# EAGLE board TinyTinyGame (EAGLE 6.5.0)
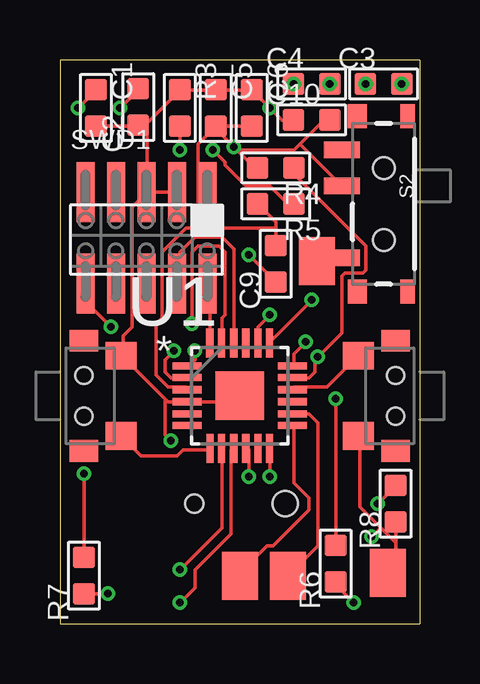
[diagram p0: board, top side]
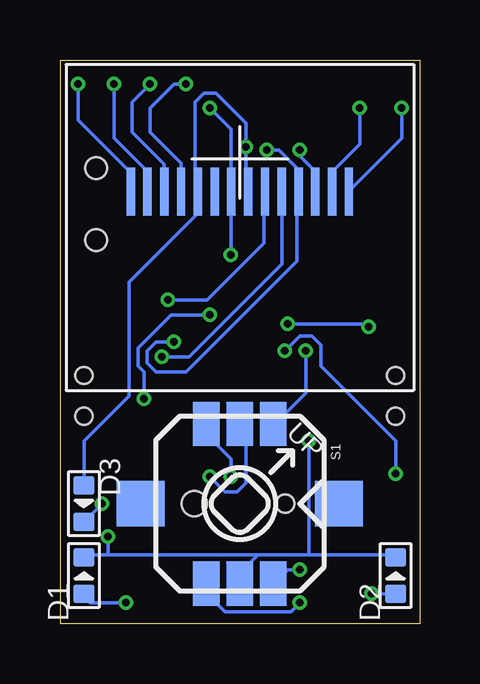
[diagram p1: board, bottom side, seen from below]

Size 15 x 23.5 mm. Coordinates in mm from the lower left corner, seen from the top.
Outline: 0,0 15,0 15,23.5 0,23.5 0,0
Copper layers (1*16): Top 0.035mm / dielectric 1.5mm / Bottom 0.035mm
Design rules "ITEADstudio_DRC": minimum track width 6mil, minimum drill 12mil, track to track 6mil, track to pad 6mil, pad to pad 6mil, via to via 6mil, smd to smd 0mil, copper to edge 10mil, drill to drill 10mil, minimum pad ring 10mil, minimum via ring 6mil, stop-mask expansion 2mil, vias tented up to drill 100mil, thermal gap 10mil

## Footprints (pad centres in the part's own frame; a part is rotated, then mirrored left to right if it is on the bottom)
C0603 = smd 0.889 x 0.889: 1 -0.762,0; 2 0.762,0
LED0603 = smd 0.762 x 0.889: + -0.762,0; - 0.762,0
PAD-1.5X4.5 = smd 1.5 x 2: P$1 0,0
R0603 = smd 0.889 x 0.889: 1 -0.762,0; 2 0.762,0
JOYSTICK_MINI = smd 1.85 x 1.1: A -3.325,1.4; B 3.325,1.4; C -3.325,-1.4; CTR -3.325,0; D 3.325,-1.4; GND 3.325,0 | smd 1.9 x 2: NC 0,4.13; NC@0 0,-4.13 | hole 0.75: 0,1.9 | hole 1.05: 0,-1.9
SWITCH-SPST-SMD-A = smd 0.7 x 1.5: 1 -2.25,-1.75; 2 -0.75,-1.75; 3 2.25,-1.75 | smd 1 x 0.6: GND1 -3.65,1; GND3 3.65,1 | smd 1 x 0.8: GND2 -3.65,-1.1; GND4 3.65,-1.1 | hole 0.9: -1.5,0; 1.5,0
M50-3600542 = smd 0.75 x 2.5: 1 -2.54,-1.81; 2 -2.54,2; 3 -1.27,-1.81; 4 -1.27,2; 5 0,-1.81; 6 0,2; 7 1.27,-1.81; 8 1.27,2; 9 2.54,-1.81; 10 2.54,2
QFN50P400X400X100-25N = smd 1.2 x 0.3: 1 -2.2,1.245; 2 -2.2,0.762; 3 -2.2,0.254; 4 -2.2,-0.254; 5 -2.2,-0.762; 6 -2.2,-1.245; 13 2.2,-1.245; 14 2.2,-0.762; 15 2.2,-0.254; 16 2.2,0.254; 17 2.2,0.762; 18 2.2,1.245 | smd 0.3 x 1.2: 7 -1.245,-2.2; 8 -0.762,-2.2; 9 -0.254,-2.2; 10 0.254,-2.2; 11 0.762,-2.2; 12 1.245,-2.2; 19 1.245,2.2; 20 0.762,2.2; 21 0.254,2.2; 22 -0.254,2.2 | smd 0.305 x 1.2: 23 -0.762,2.2; 24 -1.245,2.2 | smd 2.032 x 2.032: 25 0,0
0.49"-FPC-0.7-14-FOLDED = smd 0.35 x 2: P$1 -4.55,-1.49; P$2 -3.85,-1.49; P$3 -3.15,-1.49; P$4 -2.45,-1.49; P$5 -1.75,-1.49; P$6 -1.05,-1.49; P$7 -0.35,-1.49; P$8 0.35,-1.49; P$9 1.05,-1.49; P$10 1.75,-1.49; P$11 2.45,-1.49; P$12 3.15,-1.49; P$13 3.85,-1.49; P$14 4.55,-1.49
2X4TACT = smd 1.15 x 1.3: A -1.675,-1.55; B 1.675,-1.55 | smd 0.9 x 1.2: G1 -2.3,0; G2 2.3,0 | hole 0.7: -0.85,0; 0.85,0

## Placement (x,y rotation side)
C1  2.2uF  [C0603]  1.5,21.5 270 top
C2  4.7uF  [C0603]  3.27,21.54 90 top
C3  1uF  [C0603]  13.5,22.5 0 top
C4  1uF  [C0603]  10.5,22.5 0 top
C5  1uF  [C0603]  6.5,21.5 270 top
C6  1uF  [C0603]  8,21.5 270 top
C9  1uF  [C0603]  9,15 90 top
C10  100nF  [C0603]  10.5,21 0 top
D1  RED  [LED0603]  14,2 90 bottom
D2  GREEN  [LED0603]  1,2 90 bottom
D3  PWR  [LED0603]  14,5 270 bottom
PTB2_TXRX1  M01SMD-4.5X1.5  [PAD-1.5X4.5]  10.71,15.12 180 top
PTB2_TXRX2  M01SMD-4.5X1.5  [PAD-1.5X4.5]  13.67,2.12 180 top
PTB2_TXRX3  M01SMD-4.5X1.5  [PAD-1.5X4.5]  7.5,2 0 top
PTB2_TXRX4  M01SMD-4.5X1.5  [PAD-1.5X4.5]  9.5,2 0 top
R3  390K  [R0603]  5,21.5 270 top
R4  2k DNP  [R0603]  9,19 180 top
R5  2k DNP  [R0603]  9,17.5 180 top
R6  50  [R0603]  11.5,2.5 90 top
R7  50  [R0603]  1,2 90 top
R8  50  [R0603]  14,5 90 top
S1  [JOYSTICK_MINI]  7.5,5 270 bottom
S2  [SWITCH-SPST-SMD-A]  13.5,17.5 270 top
SWD1  CORTEX_SWD  [M50-3600542]  3.61,16.17 180 top
U1  MKL02Z32VFK4  [QFN50P400X400X100-25N]  7.5,9.5 0 top
U$1  0.49"OLEDFOLDED  [0.49"-FPC-0.7-14-FOLDED]  7.5,19.5 0 bottom
U$2  2PSWITCH_SMT_SIDEMOUNT  [2X4TACT]  1,9.5 90 top
U$3  2PSWITCH_SMT_SIDEMOUNT  [2X4TACT]  14,9.5 270 top

## Library data of the parts
C1-C6 C9 C10 D1-D3 R3-R8 = OPL
PTB2_TXRX1-PTB2_TXRX4 = SparkFun-Connectors
S1 S2 = SparkFun-Electromechanical
SWD1 = carrilib with jtags
U1 = FarnellThings; MPN: MKL02Z32VFK4; OC_FARNELL: 2321481; OC_NEWARK: 61W9887; PACKAGE: QFN-24; SUPPLIER: FREESCALE SEMICONDUCTOR
U$1 = zephod-tft
U$2 U$3 = zephod-components

## Nets
3.3V: C5.2 C6.2 C9.2 C10.2 D3.+ R4.2 R5.2 S2.2 SWD1.1 U1.3 U$1.P$5 U$1.P$8
BUTTON1: S1.A U1.2
BUTTON2: S1.D U1.9
BUTTON3: S1.C U1.10
BUTTON4: S1.B U1.8
BUTTON5: S1.CTR U1.12
C1N: C4.1 U$1.P$4
C1P: C4.2 U$1.P$3
C2N: C3.1 U$1.P$2
C2P: C3.2 U$1.P$1
GND: C1.2 C2.1 C5.1 C6.1 C9.1 C10.1 D1.- D2.- PTB2_TXRX2.P$1 R3.1 R8.1 S1.GND SWD1.3 SWD1.5 U1.4 U1.25 U$1.P$7 U$2.B U$3.B
IREF: R3.2 U$1.P$12
N$1: U1.5
N$2: U1.6
N$5: SWD1.4 U1.22
N$6: D1.+ R6.1
N$7: SWD1.2 U1.24
N$8: U$1.P$6
N$14: D2.+ R7.1
N$19: D3.- R8.2
N$20: PTB2_TXRX1.P$1 S2.3
OLED_RESET: U1.19 U$1.P$9
OLED_SCL: R4.1 U1.17 U$1.P$10
OLED_SDA: R5.1 U1.18 U$1.P$11
PTA1: SWD1.10 U1.23
PTA5: U1.7 U$2.A
PTA7: U1.11
PTA8: U1.15
PTA9: U1.16 U$3.A
PTA12: R6.2 U1.20
PTB1: PTB2_TXRX3.P$1 U1.13
PTB2: PTB2_TXRX4.P$1 U1.14
PTB6: R7.2 U1.1
PTB13: U1.21
VCCPANEL: C1.1 U$1.P$14
VCOMH: C2.2 U$1.P$13

## Tracks (layer width: path | path; a pad name or v marks a point on that pad's centre or on a via)
3.3V  (via drill 0.3)
  Top 0.152: C6.2 C5.2 6.5,20.62 | 6.5,20.62 v7.25,19.88 7.38,19.75 | 7.38,19.75 8.12,19 R4.2 | C10.2 11,21 10,20 | 10,20 9.75,19.75 7.38,19.75 | 10,20 S2.2 | 9,16.5 9,16.75 R5.2 | 9,16.5 C9.2 | 9,16.5 6.25,16.5 | 6.25,16.5 5.75,16.5 | 5.75,16.5 5.25,16.5 4.25,15.5 4.25,12.75 4,12.5 4,10.38 4.5,9.88 5.25,9.88 U1.3 | 6.25,16.5 6.25,17.88 SWD1.1 | 6.5,20.62 6.25,20.38 6.12,20.38 5.75,20 5.75,16.5
  Bottom 0.152: D3.+ 14,7.62 12.12,9.5 12.12,14.25 9.38,17 | 9.38,17 9.25,17.12 U$1.P$5 | 9.38,17 9.38,21.75 9,22.12 8.5,22.12 7.25,20.88 v7.25,19.88 7.25,18.12 U$1.P$8
BUTTON1  (via drill 0.3)
  Top 0.152: v4.75,11.38 4.38,11 4.38,10.5 4.62,10.25 5.25,10.25 U1.2
  Bottom 0.152: v4.75,11.38 4.75,9.62 6,8.38 S1.A
BUTTON2  (via drill 0.3)
  Top 0.152: v5,0.88 5.62,1.5 5.62,2.25 7.12,3.75 7.12,7.25 U1.9
  Bottom 0.152: v5,0.88 5.38,0.5 8.12,0.5 8.88,1.25 8.88,1.62 S1.D
BUTTON3  (via drill 0.3)
  Top 0.152: v7.88,6.12 7.88,7.25 U1.10
  Bottom 0.152: v7.88,6.12 7.88,6.88 8.88,7.88 8.88,8.25 S1.C
BUTTON4  (via drill 0.3)
  Top 0.152: v5,2.25 6.75,4 6.75,7.25 U1.8
  Bottom 0.152: v5,2.25 5.5,2.25 6,1.75 S1.B
BUTTON5  (via drill 0.3)
  Top 0.152: v8.75,6.12 8.75,7.25 U1.12
  Bottom 0.152: v8.75,6.12 8.12,5.5 7.62,5.5 7.25,5.88 7.25,8 7.5,8.25 S1.CTR
C1N  (via drill 0.3)
  Top 0.152: v9.75,22.5 C4.1
  Bottom 0.152: U$1.P$4 9.95,19.2 11.25,20.5 11.25,21.5 10.25,22.5 v9.75,22.5
C1P  (via drill 0.3)
  Top 0.152: v11.25,22.5 C4.2
  Bottom 0.152: U$1.P$3 10.65,19.15 12,20.5 12,21.75 v11.25,22.5
C2N  (via drill 0.3)
  Top 0.152: v12.75,22.5 C3.1
  Bottom 0.152: U$1.P$2 11.35,18.85 12.75,20.25 v12.75,22.5
C2P  (via drill 0.3)
  Top 0.152: v14.25,22.5 C3.2
  Bottom 0.152: U$1.P$1 12.05,18.8 14.25,21 14.25,22.49 | 14.25,22.49 C3.2 | v14.25,22.5 14.25,22.49
GND  (via drill 0.3)
  Top 0.152: 14,3.38 14,2.38 13.75,2.12 PTB2_TXRX2.P$1 | 14,3.38 R8.1 | 14,3.38 13.38,4 | 13.38,4 12.5,4.88 12.5,7.75 U$3.B | v13,3.62 13.38,4 | U1.25 7.25,9.25 5.38,9.25 U1.4 5.25,9.25 4.5,9.25 4.38,9.38 | 4.38,9.38 2.62,11.12 U$2.B 2.62,11.25 2.62,12 3,12.38 3,17.38 3.5,17.88 SWD1.5 3.62,18 | v7.88,15.38 C9.1 | 3.62,18 4.88,18 SWD1.3 | C1.2 3.25,20.75 C2.1 | C5.1 R3.1 | C5.1 C6.1 | C5.1 | C10.1 9.25,21 v8.75,21.5 C6.1 | C6.1 | 3.62,20.88 3.38,20.88 C2.1 | R3.1 3.62,20.88 | R3.1 | 3.62,20.88 3.62,18 | 3.62,20.88 C2.1 | v4.62,7.62 4.38,7.88 4.38,9.38
  Bottom 0.152: 6.75,2.88 4.62,2.88 | 4.62,2.88 1,2.88 D2.- | 6.75,2.88 7.5,2.12 S1.GND | 6.75,2.88 13,2.88 | 13,2.88 14,2.88 D1.- | 13,2.88 v13,3.62 | v7.88,15.38 7.88,18 U$1.P$7 7.88,18.12 7.88,20.62 v8.75,21.5 | v4.62,7.62 4.62,2.88
IREF  (via drill 0.3)
  Top 0.152: v5,19.75 R3.2
  Bottom 0.152: v5,19.75 5,19.5 4.38,18.88 4.38,18.12 U$1.P$12
N$5
  Top 0.152: U1.22 7.25,11.75 7.25,15.62 6.75,16.12 5.62,16.12 5,15.5 5,14.25 SWD1.4
N$6  (via drill 0.3)
  Top 0.152: v12.25,0.88 11.5,1.62 R6.1
  Bottom 0.152: v12.25,0.88 13.75,0.88 14,1.12 D1.+
N$7
  Top 0.152: U1.24 6.25,11.75 6.25,14.12 SWD1.2
N$14  (via drill 0.3)
  Top 0.152: v2,1.25 R7.1
  Bottom 0.152: v2,1.25 R7.1
N$19  (via drill 0.3)
  Top 0.152: v13.25,5 R8.2
  Bottom 0.152: v13.25,5 D3.-
N$20
  Top 0.152: S2.3 10.88,15.25 10.75,15.12 PTB2_TXRX1.P$1
OLED_RESET  (via drill 0.3)
  Top 0.152: v10.5,13.5 8.75,11.75 U1.19
  Bottom 0.152: v10.5,13.5 8.88,13.5 6.5,15.88 6.5,18 U$1.P$9
OLED_SCL  (via drill 0.3)
  Top 0.152: R4.1 9.88,19 9.88,18.62 12.75,15.75 12.75,14.75 12.62,14.62 11.88,14.62 11.75,14.5 11.75,12.12 v10.75,11.12 10.62,11 10.62,10.5 10.38,10.25 9.75,10.25 U1.17
  Bottom 0.152: U$1.P$10 5.75,15 9.62,11.12 v10.75,11.12
OLED_SDA  (via drill 0.3)
  Top 0.152: R5.1 9.5,17.5 8.75,18.25 7.75,18.25 6.88,19.12 6.88,19.25 v6.38,19.75 | v10.25,11.75 9.75,11.25 9.75,10.75 U1.18
  Bottom 0.152: v6.38,19.75 5.88,19.75 5.12,19 5.12,18.12 U$1.P$11 5.12,18 5.12,15.12 9.75,10.5 11,10.5 11.38,10.88 11.38,11.38 11,11.75 v10.25,11.75
PTA1  (via drill 0.3)
  Top 0.152: v5.5,12.5 5.5,15.5 5.75,15.75 6.62,15.75 6.88,15.5 6.88,12.88 6.75,12.75 6.75,11.75 U1.23 | v2.12,12.38 1.12,13.38 1.12,14.12 SWD1.10
  Bottom 0.152: v5.5,12.5 2.25,12.5 v2.12,12.38
PTA5
  Top 0.152: U$2.A 3.38,7 4.88,7 5.12,7.25 6.25,7.25 U1.7
PTA9
  Top 0.152: U1.16 9.75,9.88 11.12,9.88 12.38,11.12 U$3.A
PTA12  (via drill 0.3)
  Top 0.152: v11.5,9.38 R6.2 | v8.75,12.88 8.25,12.38 8.25,11.75 U1.20
  Bottom 0.152: v11.5,9.38 11.5,10.5 11.75,10.75 11.75,11.5 10.38,12.88 v8.75,12.88
PTB1
  Top 0.152: PTB2_TXRX3.P$1 7.5,2.12 8.62,3.25 8.88,3.25 10.38,4.75 10.38,5.25 9.75,5.88 9.75,8.25 U1.13
PTB2
  Top 0.152: PTB2_TXRX4.P$1 10.75,3.25 10.75,8.38 10.38,8.75 9.75,8.75 U1.14
PTB6  (via drill 0.3)
  Top 0.152: v1,6.25 R7.2 | v5.62,11.38 5.62,11 5.38,10.75 U1.1
  Bottom 0.152: v1,6.25 1,7.62 4.12,10.75 4.12,11.62 4.5,12 5,12 v5.62,11.38
VCCPANEL  (via drill 0.3)
  Top 0.152: v0.75,21.5 C1.1
  Bottom 0.152: v0.75,21.5 0.75,20.25 2.88,18.12 U$1.P$14
VCOMH  (via drill 0.3)
  Top 0.152: v2.5,21.5 3.25,22.25 C2.2
  Bottom 0.152: v2.5,21.5 2.5,20 3.62,18.88 3.62,18.12 U$1.P$13